# EAGLE board Minimal-Driver (EAGLE 7.6.0)
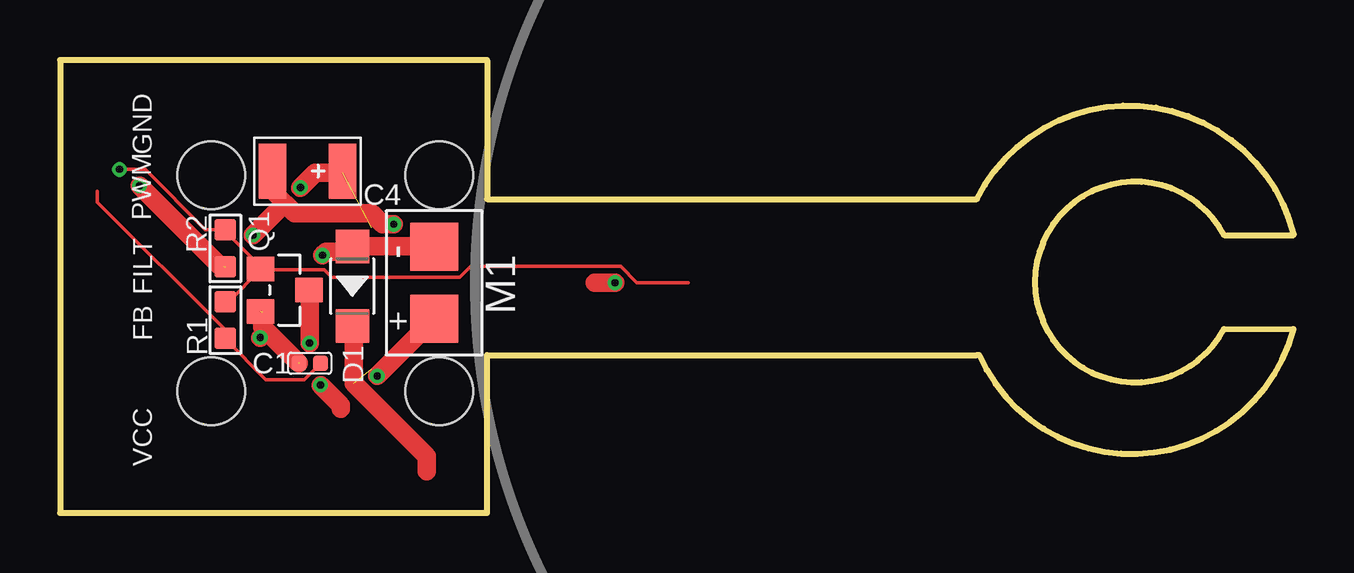
[diagram p0: board, top side]
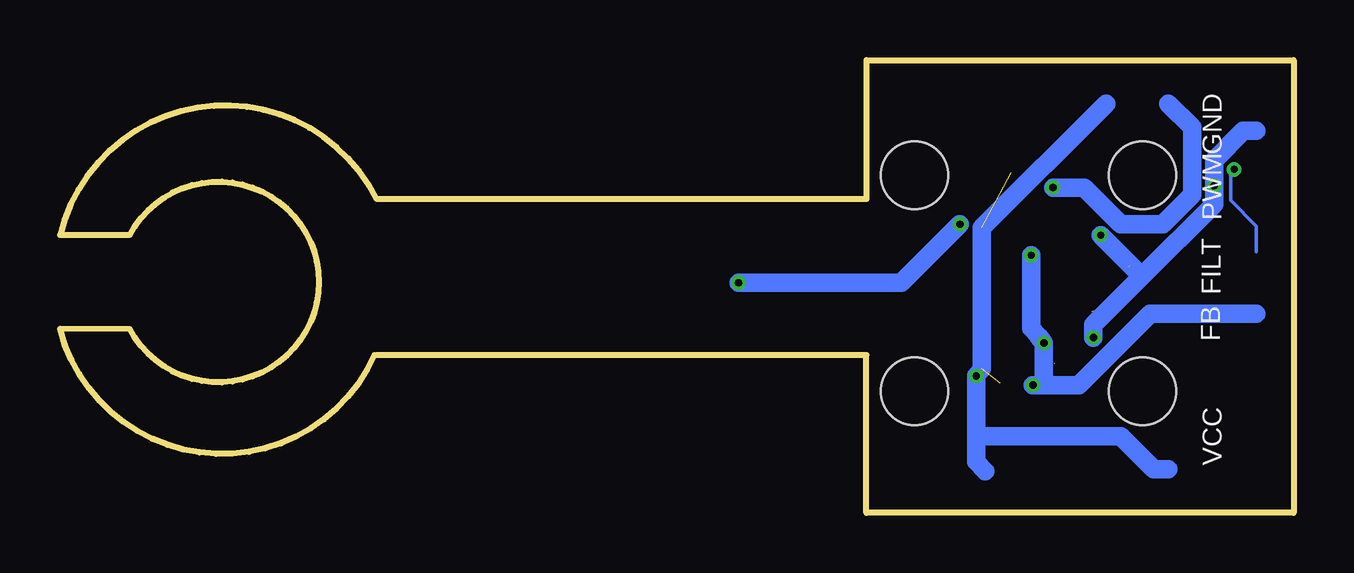
[diagram p1: board, bottom side, seen from below]

Size 51.4 x 18.87 mm. Coordinates in mm from the lower left corner, seen from the top.
Outline: 38.2,6.57 17.8,6.57 17.8,0 0,0 0,18.87 17.8,18.87 17.8,13.07 38.2,13.07 arc-140 51.4,11.57 48.5,11.57 arc304 48.5,7.67
Outline: 48.5,7.66 51.38,7.67
Outline: 38.3,6.57 arc141 51.4,7.67
Copper layers (1*16): Top 0.035mm / dielectric 1.5mm / Bottom 0.035mm
Design rules "SeeedStudio_2layer_DRU_no_angle_20140221": minimum track width 6mil, minimum drill 12mil, track to track 6mil, track to pad 6mil, pad to pad 6mil, via to via 6mil, smd to smd 0mil, copper to edge 10mil, drill to drill 10mil, minimum pad ring 10mil, minimum via ring 6mil, stop-mask expansion 2mil, vias tented up to drill 100mil, thermal gap 10mil
Net classes: 1 HighAmps: width 0.762 mm
Holes 2.8 mm at 15.8,14.07 15.8,5.07 6.3,5.07 6.3,14.07

## Footprints (pad centres in the part's own frame; a part is rotated, then mirrored left to right if it is on the bottom)
C0402 = smd 0.635 x 0.635: 1 0,0.445; 2 0,-0.445
AVX-B = smd 1.143 x 2.286: + -1.46,0; - 1.46,0
SOD-123 = smd 1.397 x 1.397: + -1.651,0; - 1.651,0
MOTOR_PADS = smd 2 x 2: V+ -1,0; V- 2,0
SOT-23 = smd 1.016 x 1.143: 1 -0.889,-1.016; 2 0.889,-1.016; 3 0,1.016
R0603 = smd 0.889 x 0.889: 1 0,0.762; 2 0,-0.762

## Placement (x,y rotation side)
C1  1uf  [C0402]  10.41,6.23 90 top
C4  100uf  [AVX-B]  10.32,14.23 180 top
D1  20V-500MA  [SOD-123]  12.18,9.45 270 top
M1  MOTOR_PADS  [MOTOR_PADS]  15.59,9.08 90 top
Q1  CJ2302  [SOT-23]  9.37,9.28 270 top
R1  100R  [R0603]  6.89,8.03 180 top
R2  10K 1/10W  [R0603]  6.89,11.03 180 top

## Library data of the parts
C1 = Seeed-Capacitor-2016; MPN: CC0402KRX5R6BB105
C4 = Seeed-Capacitor-2016; MPN: TAJB107M010#NJ
D1 = Seeed-Diode-2016; MPN: SS0520-7-F
M1 = Andranik-Lab4
Q1 = Seeed-Transistor-2016; MPN: CJ2302
R1 = Seeed-Resistor-2016; MPN: RC0603JR-07100RL
R2 = Seeed-Resistor-2016; MPN: RC0603JR-0710KL

## Nets
FILTERED: Q1.1 R1.2 R2.2
FLYBACK [HighAmps]: D1.+ M1.V- Q1.3
GND [HighAmps]: C1.1 C4.- Q1.2 R2.1
PWM: C1.2 R1.1
VCC [HighAmps]: C4.+ D1.- M1.V+

## Tracks (layer width: path | path; a pad name or v marks a point on that pad's centre or on a via)
FILTERED  (via drill 0.3)
  Top 0.152: 26.18,9.59 24.04,9.59 23.36,10.28 17.11,10.28 16.65,9.82 11.32,9.82 11.01,10.12 8.42,10.12 Q1.1 | R1.2 6.9,8.83 7.05,8.83 8.34,10.12 Q1.1 | Q1.1 8.42,10.2 6.9,11.72 R2.2 6.82,11.8 6.06,11.8 3.54,14.31 v2.48,14.31
  Bottom 0.152: 1.56,10.88 1.56,11.95 2.63,13.02 2.63,14.16 v2.48,14.31
FLYBACK  (via drill 0.3)
  Top 0.762: M1.V- 15.58,11.11 12.23,11.11 D1.+ 11.85,10.88 11.09,10.88 v10.94,10.73 | 11.7,4.33 11.7,4.48 v10.86,5.32 | v10.4,7.07 10.4,9.21 Q1.3
  Bottom 0.762: 10.4,5.32 8.95,5.32 5.98,8.29 1.56,8.29 | 10.4,5.32 v10.86,5.32 | 10.4,5.32 v10.4,7.07 10.63,7.38 10.94,7.69 v10.94,10.73
GND  (via drill 0.3)  (3 unrouted)
  Top 0.762: v23.13,9.59 22.29,9.59 | v13.91,12.03 13.45,12.03 12.99,12.48 9.79,12.48 9.37,12.91 | 9.37,12.91 8.88,13.4 8.88,14.16 C4.- | 8.61,7.57 8.42,7.76 8.42,8.37 | 8.61,7.57 9.94,6.24 | 6.82,10.28 6.67,10.28 v3.32,13.63 | v8.34,7.3 8.61,7.57 | v8.04,11.57 9.37,12.91
  Bottom 0.762: v23.13,9.59 16.34,9.59 v13.91,12.03 | 1.56,15.91 2.09,15.91 3.32,14.7 v3.32,13.63 3.32,12.87 6.32,9.86 | v8.34,7.3 8.34,7.84 6.32,9.86 | 6.32,9.86 v8.04,11.57
PWM
  Top 0.152: C1.2 10.78,6.16 10.17,5.55 8.57,5.55 6.9,7.23 R1.1 6.82,7.3 6.82,7.69 1.56,12.94 1.56,13.4
VCC  (via drill 0.3)  (2 unrouted)
  Top 0.762: v13.22,5.7 15.58,8.07 M1.V+ | v10.02,13.55 10.63,14.16 11.77,14.16 C4.+ | 15.28,1.74 15.28,2.35 12.23,5.4 12.23,7.76 D1.-
  Bottom 0.762: 13.22,3.19 13.22,2.12 12.84,1.74 | 13.22,3.19 v13.22,5.7 12.99,6.01 12.99,11.88 7.81,17.06 | 5.22,1.82 5.83,1.82 7.2,3.19 13.22,3.19 | v10.02,13.55 8.72,13.55 7.2,12.03 5.45,12.03 4.23,13.25 4.23,16.07 5.22,17.06

## Text on the board
tPlace: GND | PWM | FILT | FB | VCC
bPlace: GND | PWM | FILT | FB | VCC